# Altium PCB Battery_Operated Node_Ver1.PcbDoc
Units mm, origin at the board's own origin, x right, y up, seen from the top; angles counter-clockwise.
Board outline 41.22 x 57.73 mm, 2 copper layers (Top, Bottom), stack 1.57 mm thick; 58 components, 54 nets, 233 pads, 54 vias.
Unrouted connection lines stored in the file: 1.
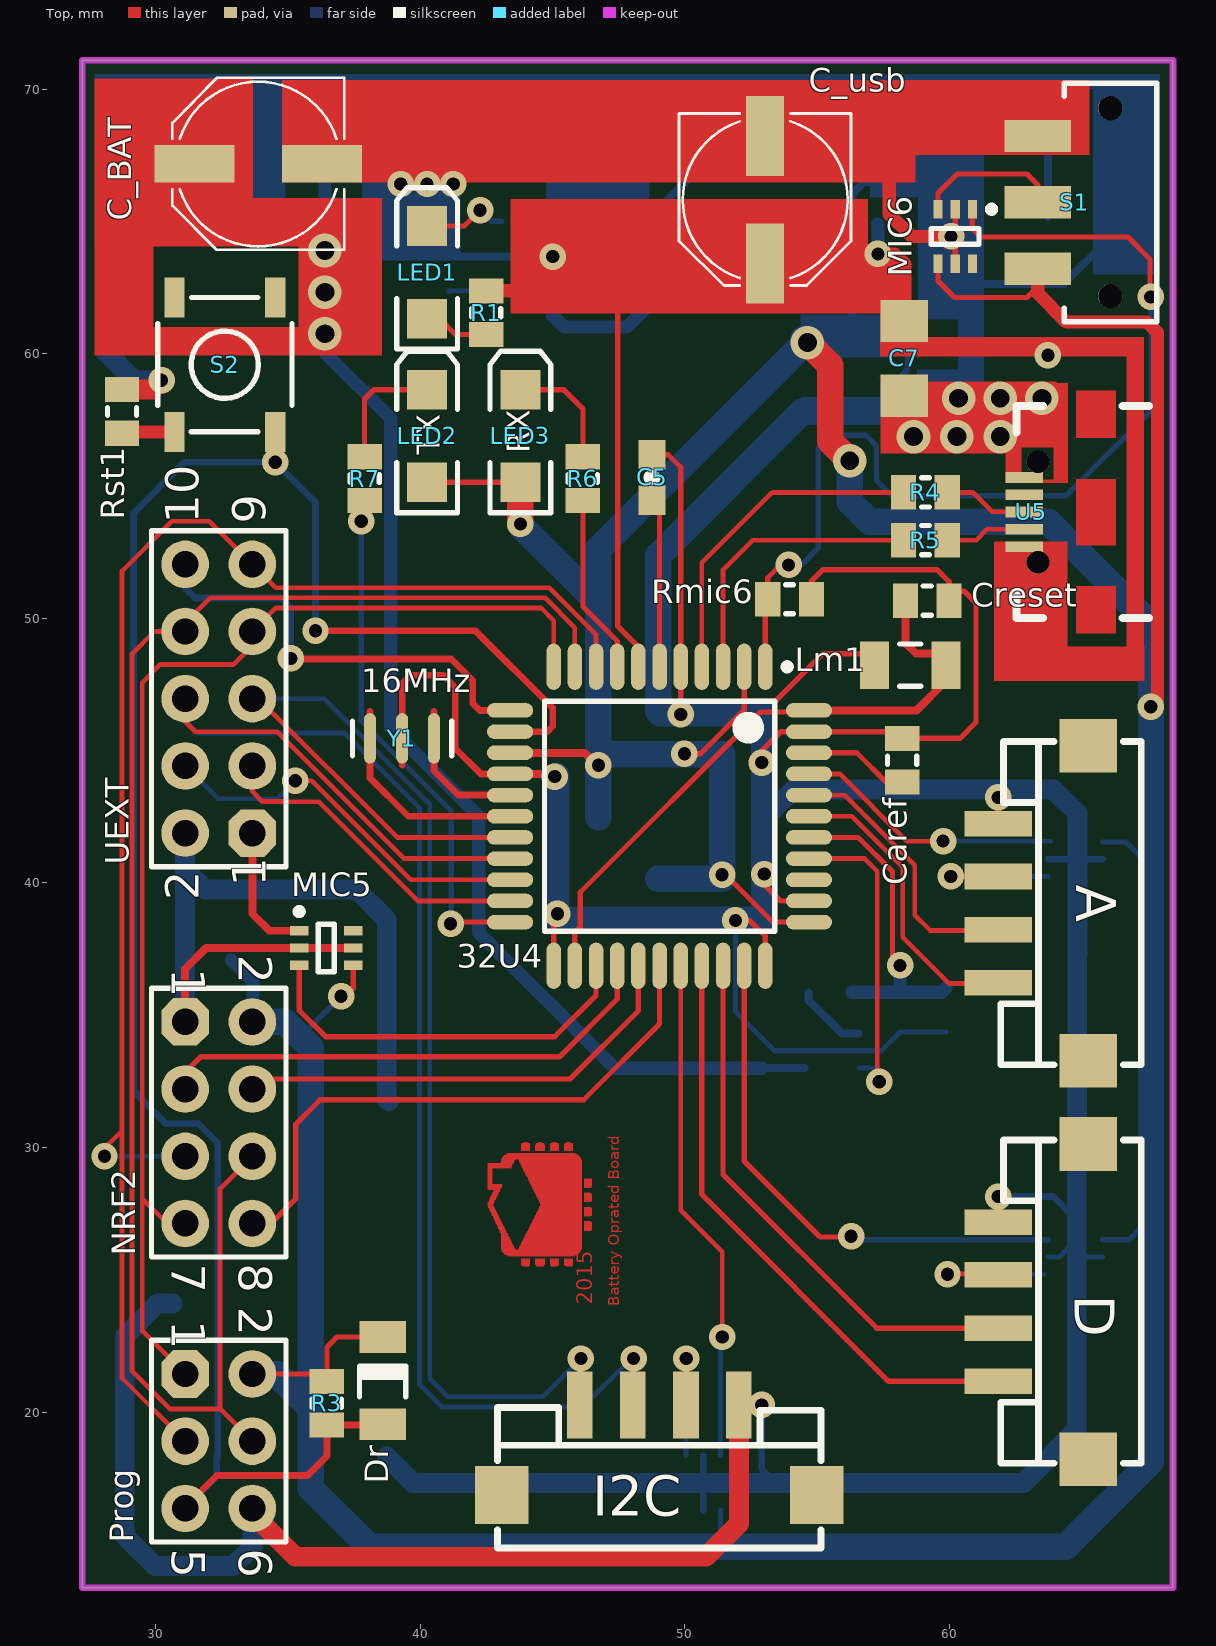
[diagram p0: Top view]
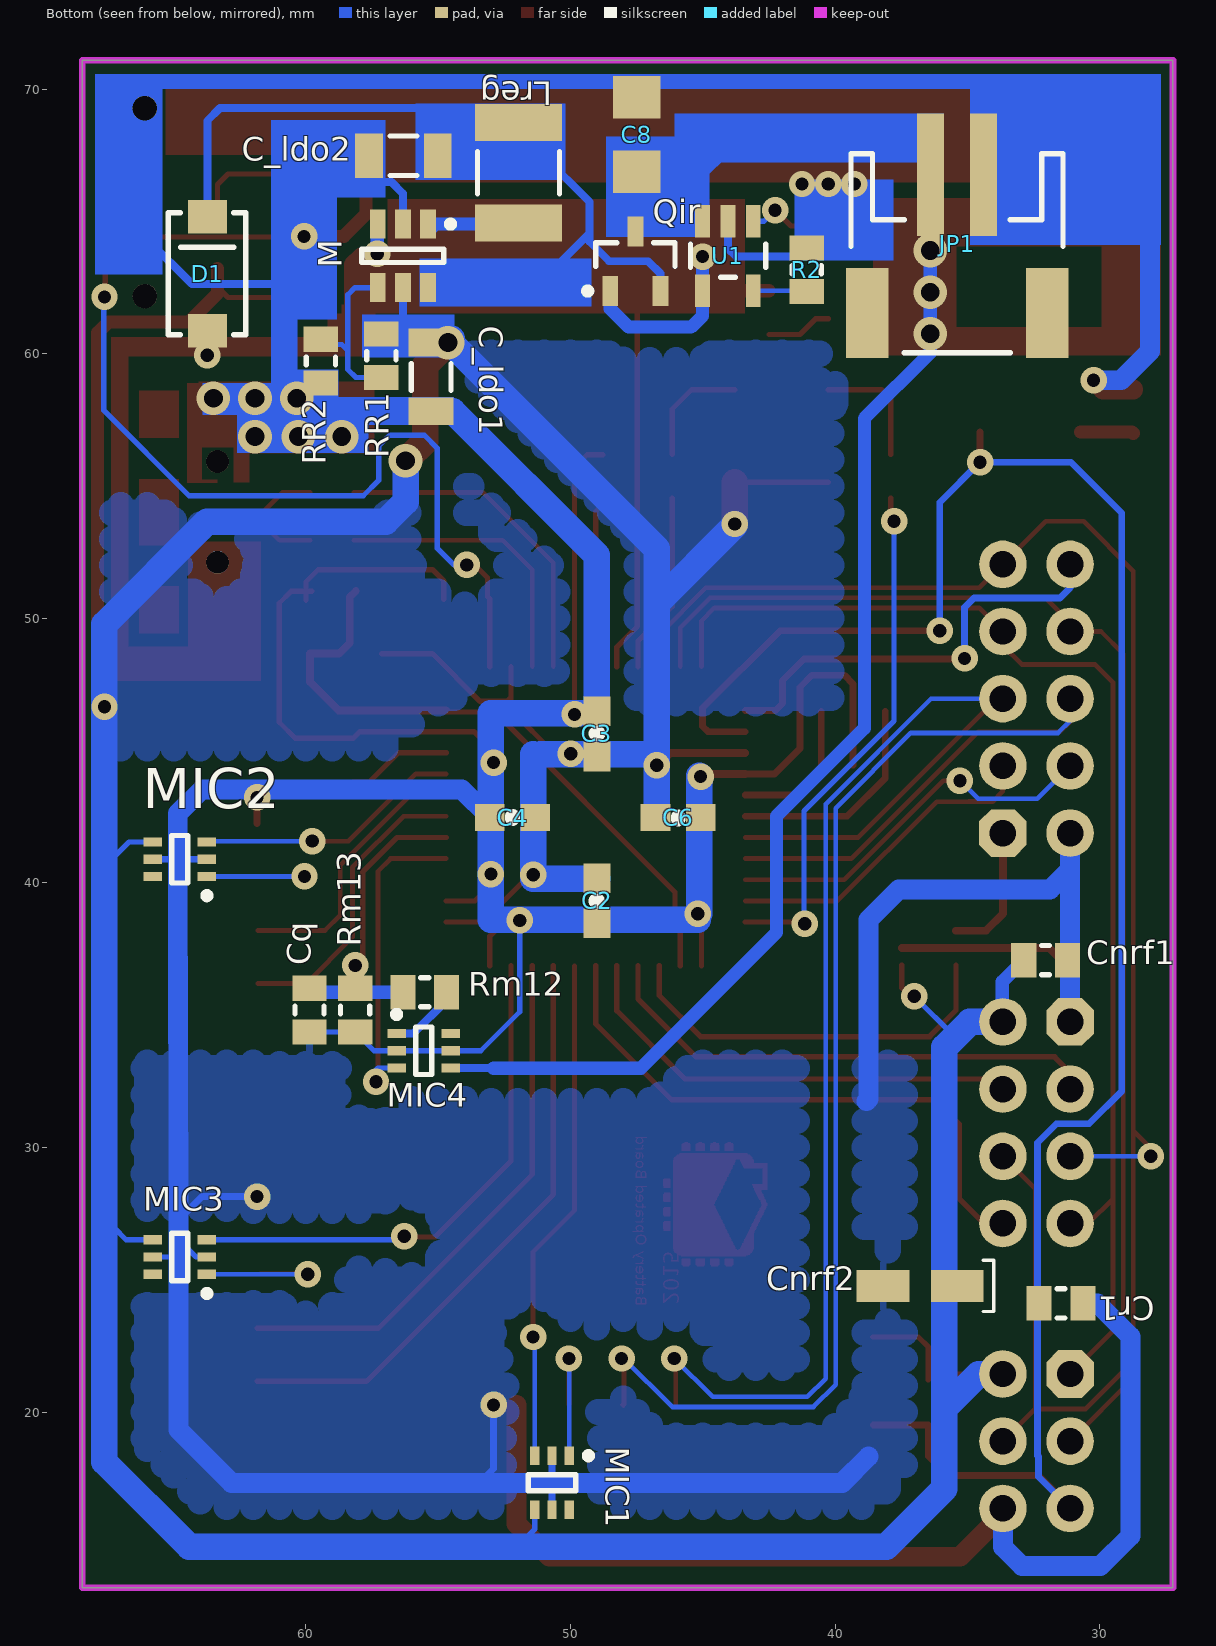
[diagram p1: Bottom view, seen from below]

## Layer stack, top to bottom
Top Solder: solder mask 0.0102, Solder Resist, Dk 3.5
Top: signal copper 0.035
Dielectric 1: core 1.5, FR-4, Dk 4.8
Bottom: signal copper 0.035
Bottom Solder: solder mask 0.0102, Solder Resist, Dk 3.5

## Board outline
27.229,13.36 27.229,71.095 68.453,71.095 68.453,13.36

## Design rules (kind name [scope] priority, off if disabled: settings)
Clearance POLY [InPolygon] p1: gap=0.5
Clearance mdViaVia [IsVia vs IsVia] p2: gap=0.203
Clearance mdPadVia [IsPad vs IsVia] p3: gap=0.203
Clearance mdPadPad [IsPad vs IsPad] p4: gap=0.203
Clearance mdWireVia [(InLayerClass('Signal Layers') AND IsTrack) vs IsVia] p5: gap=0.203
Clearance mdWirePad [(InLayerClass('Signal Layers') AND IsTrack) vs IsPad] p6: gap=0.203
Clearance mdWireWire [(InLayerClass('Signal Layers') AND IsTrack) vs (InLayerClass('Signal Layers') AND IsTrack)] p7: gap=0.203
Clearance [All] p8: gap=0.2
HoleSize [All] p1: absolutevalues=TRUE maxlimit=2540 minlimit=0.381 maxpercent=80.000 minpercent=20.000
HoleToHoleClearance [All] p1: gap=0.203 allowstackedmicrovias=TRUE
PolygonConnect ThermalVias [IsVia] p1: connectstyle=Direct reliefconductorwidth=0.254 reliefentries=4 polygonreliefangle="90 Angle" airgapwidth=0.254
PolygonConnect [All] p2: connectstyle=Relief reliefconductorwidth=0.254 reliefentries=4 polygonreliefangle="90 Angle" airgapwidth=0.254
RoutingVias [All] p1: holewidth=0.5 width=1 viastyle="Through Hole" minholewidth=0.5 minwidth=1 maxholewidth=0.711 maxwidth=1.27
SilkToSilkClearance [All] p1 off: silktosilkclearance=0.254
SilkToSolderMaskClearance [IsPad] p1 off: minsilkscreentomaskgap=0.254 clearancetoexposedcopper=TRUE
SolderMaskExpansion [All] p1: expansion=0.102
Width [All] p1: maxlimit=2540 minlimit=0.178 preferedwidth=0.254
26 further rules are at their usual default settings.

## Components (designator, comment, footprint, x,y, rotation, side; value= is the part's Value field where it differs from the comment)
32U4 "ATmega32U4-AU" 44ML_N 49.047,42.52 r270 top
A "TWIG-4P-2.0-SMD" 4P-SMD-2.0 61.849,39.243 r270 top
C2 ".1uF" 0603-CAP 48.997,39.319 r90 bottom
C3 ".1uF" 0603-CAP 49.004,45.644 r270 bottom
C4 ".1uF" 0603-CAP 52.197,42.469 r180 bottom
C5 "1uF" 0603-CAP 48.768,55.322 r90 top
C6 "4.7uF" 0603-CAP 45.923,42.469 r0 bottom
C7 "4.7uF" 1206 58.293,59.817 r90 top
C8 "4.7uF" 1206 47.498,68.301 r270 bottom
C_BAT "" PANASONIC_D 33.884,67.183 r180 top
C_ldo1 "4.7uF" SMD_CAP_1206 55.27,60.427 r270 bottom
C_ldo2 "4.7uF" SMD_CAP_1206 55.016,67.488 r0 bottom
C_usb "" PANASONIC_D 53.035,65.837 r270 top
Caref "100nF" SMD_CAP_0805 58.217,45.466 r270 top
Cnrf1 "100nF" SMD_CAP_0805 32.868,37.084 r180 bottom
Cnrf2 "4.7uF" "CAPP 1206 (3216X18L) Size A" 35.382,24.765 r0 bottom
Cq "100nF" SMD_CAP_0805 59.868,36.017 r270 bottom
Cr1 "4.7nF" SMD_CAP_0805 32.283,24.105 r180 bottom
Creset "10nF" SMD_CAP_0805 59.995,50.673 r180 top
D "TWIG-4P-2.0-SMD" 4P-SMD-2.0 61.849,24.181 r270 top
D1 "B340A" SMA-DIODE 63.729,63.017 r90 bottom
Dr "1N4148" LL4148 38.583,21.184 r90 top
I2C "TWIG-4P-2.0-SMD" 4P-SMD-2.0 49.047,20.269 r180 top
JP1 "JST-2" JST-2-SMD 35.382,63.068 r0 bottom
LED1 "RED" "LED SMD 1206" 40.259,63.081 r90 top
LED2 "RED" "LED SMD 1206" 40.259,56.896 r90 top
LED3 "RED" "LED SMD 1206" 43.79,56.896 r90 top
Lm1 "Inductor" INDC3216 58.522,48.235 r180 top
Lreg "Inductor" INDC4532 51.968,66.853 r270 bottom
M "mcp1640" MCP1640 56.337,63.703 r270 bottom
MIC1 "MIC94060" mic94060 50.698,17.323 r270 bottom
MIC2 "MIC94060" mic94060 64.77,40.894 r0 bottom
MIC3 "MIC94060" mic94060 64.77,25.857 r0 bottom
MIC4 "MIC94060" mic94060 55.55,33.655 r180 bottom
MIC5 "MIC94060" mic94060 36.449,37.541 r0 top (schematic designator MIC1)
MIC6 "MIC94060" mic94060 60.223,64.44 r270 top (schematic designator MIC1)
NRF2 "Header 4X2" HDR2X4 31.115,34.747 r270 top
Prog "Header 3X2" HDR2X3 31.115,21.438 r270 top
Qir "IRLML6401" Micro3_N 47.549,63.5 r90 bottom
R1 "330" "RES 0805 (2012X06L)" 42.494,62.381 r270 top
R2 "10k" "RES 0805 (2012X06L)" 41.072,62.357 r90 bottom
R3 "4.7k" "RES 0805 (2012X06L)" 36.474,19.507 r90 top
R4 "22" "RES 0805 (2012X06L)" 59.922,54.762 r180 top
R5 "22" "RES 0805 (2012X06L)" 59.922,52.959 r180 top
R6 "330" "RES 0805 (2012X06L)" 46.152,56.112 r270 top
R7 "330" "RES 0805 (2012X06L)" 37.897,56.112 r270 top
Rm12 "1M" "RES 0805 (2012X06L)" 54.686,35.865 r0 bottom
Rm13 "470K" "RES 0805 (2012X06L)" 58.141,36.017 r270 bottom
Rmic6 "330" "RES 0805 (2012X06L)" 53.137,50.721 r0 top
RR1 "976" "RES 0805 (2012X06L)" 57.15,59.106 r90 bottom
RR2 "562" "RES 0805 (2012X06L)" 59.436,58.903 r90 bottom
Rst1 "330" "RES 0805 (2012X06L)" 28.727,58.649 r270 top
S1 "" SWITCH-SPDT-SMD 66.091,65.735 r270 top
S2 "!RESET" TACTILE_SWITCH_SMD 32.614,59.588 r90 top
U1 "MCP73831" SOT23-5 44.044,63.71 r0 bottom
U5 "USB-ABCONN-11794" USB-AB-MICRO-SMD_V03 65.557,54.026 r180 top
UEXT "Header 5X2" HDR2X5 33.655,41.885 r90 top
Y1 "16MHz" RESONATOR-SMD 39.319,45.466 r180 top

## Footprints (in the part's own frame and the unit in brackets; to place one, negate y for a bottom-side part, rotate by r counter-clockwise, add the part's x,y. Pads: shape width x height; smd on the part's side, far side on the other; paste and mask are expansions set on the pad)
4P-SMD-2.0 [mil]
  rect 38x100 smd: 1(-118.11,0) 2(-39.37,0) 3(40,0) 4(119,0)
  rect 80x86 smd: SS1(-234.09,134) SS2(235,134)
  silkscreen extent -240,4 241,213
44ML_N [mm] "Thin QFP, 44-Leads, Body 10x10mm, Pitch 0.8mm, IPC Medium Density"
  oval 1.75x0.55 smd: 1(-5.65,4) 2(-5.65,3.2) 3(-5.65,2.4) 4(-5.65,1.6) 5(-5.65,0.8) 6(-5.65,0) 7(-5.65,-0.8) 8(-5.65,-1.6) 9(-5.65,-2.4) 10(-5.65,-3.2) 11(-5.65,-4) 23(5.65,-4) 24(5.65,-3.2) 25(5.65,-2.4) 26(5.65,-1.6) 27(5.65,-0.8) 28(5.65,0) 29(5.65,0.8) 30(5.65,1.6) 31(5.65,2.4) 32(5.65,3.2) 33(5.65,4)
  oval 0.55x1.75 smd: 12(-4,-5.65) 13(-3.2,-5.65) 14(-2.4,-5.65) 15(-1.6,-5.65) 16(-0.8,-5.65) 17(0,-5.65) 18(0.8,-5.65) 19(1.6,-5.65) 20(2.4,-5.65) 21(3.2,-5.65) 22(4,-5.65) 34(4,5.65) 35(3.2,5.65) 36(2.4,5.65) 37(1.6,5.65) 38(0.8,5.65) 39(0,5.65) 40(-0.8,5.65) 41(-1.6,5.65) 42(-2.4,5.65) 43(-3.2,5.65) 44(-4,5.65)
  silkscreen extent -5.77,-4.35 4.35,4.95, body extent -5,-5 5,5, height 1.2
0603-CAP [mil] "0603-CAP"
  rect 44x40 smd: 1(-33.46,0) 2(34,0)
  silkscreen extent 0,-1 0,2
1206 [mil] "1206"
  rect 63x71 smd: 1(-55.12,0) 2(56,0)
"CAPP 1206 (3216X18L) Size A" [mm] "Chip Capacitor, 2-Leads, Body 3.2x1.6mm, IPC High Density, chip Tantalum"
  rect 1.999x1.199 smd: 1(0,0) 2(2.8,0)
  silkscreen extent -1.38,-0.97 -0.99,0.97, body extent -0.43,-0.9 3.21,0.9, height 1.8
HDR2X3 [mm]
  oct 1.8x1.8 hole 1: 1(0,0)
  round 1.8 hole 1: 2(0,2.54) 3(2.54,0) 4(2.54,2.54) 5(5.08,0) 6(5.08,2.54)
  silkscreen extent -1.27,-1.27 6.35,3.81
HDR2X4 [mm]
  oct 1.8x1.8 hole 1: 1(0,0)
  round 1.8 hole 1: 2(0,2.54) 3(2.54,0) 4(2.54,2.54) 5(5.08,0) 6(5.08,2.54) 7(7.62,0) 8(7.62,2.54)
  silkscreen extent -1.27,-1.27 8.89,3.81
HDR2X5 [mm]
  oct 1.8x1.8 hole 1: 1(0,0)
  round 1.8 hole 1: 2(0,2.54) 3(2.54,0) 4(2.54,2.54) 5(5.08,0) 6(5.08,2.54) 7(7.62,0) 8(7.62,2.54) 9(10.16,0) 10(10.16,2.54)
  silkscreen extent -1.27,-1.27 11.43,3.81
INDC3216 [mm] "Chip Inductor, Body 3.2x1.6mm, IPC High Density"
  rect 1.1x1.8 smd: 1(-1.35,0) 2(1.35,0)
  silkscreen extent -0.4,-0.8 0.4,0.8
INDC4532 [mm] "Chip Inductor, Body 4.5x3.2mm, IPC High Density"
  rect 1.4x3.3 smd: 1(-1.9,0) 2(1.9,0)
  silkscreen extent -0.8,-1.55 0.8,1.55, body extent -2.25,-1.6 2.25,1.6, height 1.75
JST-2-SMD [mil] "JST-2-SMD"
  rect 40x182 smd: 1(-39.37,-145.67) 2(40,-145.67)
  rect 63x134 smd: NC1(-133.86,60) NC2(134,60)
  silkscreen extent -157,-177 158,119
"LED SMD 1206" [mm]
  rect 1.5x1.5 smd: 1(-1.75,0) 2(1.75,0)
  silkscreen extent -2.9,-1.15 3.2,1.15, body extent -1.65,-0.76 1.65,0.69, height 1.36
LL4148 [mm] "MELF Diode, 2-Leads, Body 3.5x1.4mm, IPC Medium Density"
  rect 1.2x1.75 smd: 1(-1.65,0) 2(1.65,0)
  silkscreen extent -0.61,-0.88 0.57,0.88, body extent -1.78,-0.75 1.72,0.75, height 1.55
MCP1640 [mm] "SOT23, 6-Leads, Body 2.90x2.70mm, Pitch 0.95mm, IPC Medium Density"
  rect 1.1x0.6 smd: 1(-1.2,0.95) 2(-1.2,0) 3(-1.2,-0.95) 4(1.2,-0.95) 5(1.2,0) 6(1.2,0.95)
  silkscreen extent -1.32,-1.55 0.25,1.92, body extent -0.9,-1.55 0.9,1.55, height 0.9
mic94060 [mm] "6 pin sc70"
  rect 0.7x0.35 smd: 1(-1.025,0.65) 2(-1.025,0) 3(-1.025,-0.65) 4(1.025,-0.65) 5(1.025,0) 6(1.025,0.65)
  silkscreen extent -1.15,-0.9 0.3,1.5, body extent -0.58,-0.9 0.58,0.9, height 1.1
Micro3_N [mm] "SOT23, 3-Leads, Body 2.9x1.3mm, Pitch 0.95mm, Lead Span 2.3mm, IPC Medium Density"
  rect 1.15x0.6 smd: 1(-1.125,0.95) 2(-1.125,-0.95) 3(1.125,0)
  silkscreen extent -1.25,-1.5 0.7,1.93, body extent -0.7,-1.5 0.7,1.5, height 1.12
PANASONIC_D [mil]
  rect 119x56 smd: +(95,0) -(-94.49,0)
  silkscreen extent -128,-128 128,128
"RES 0805 (2012X06L)" [mm] "Chip Resistor, 2-Leads, Body 2.0x1.3mm, IPC High Density _ (0.100 W)"
  rect 0.95x1.3 smd: 1(0,0) 2(1.65,0)
  silkscreen extent 0.67,-0.55 0.97,0.55, body extent -0.19,-0.63 1.84,0.64, height 0.6
RESONATOR-SMD [mil]
  rrect100% 18x75 smd: 1(-47.24,0) 2(0,0) 3(48,0)
  Top lines w10: 48,40 48,0 48,-40 ; 0,40 0,0 0,-40 ; -47.24,40 -47.24,0 -47.24,-40
  silkscreen extent -74,-25 74,26
SMA-DIODE [mil] "SMA-DIODE"
  rect 50x58 smd: A(-84.65,0) C(85,0)
  silkscreen extent -91,-57 91,58
SMD_CAP_0805 [mm]
  rect 0.95x1.3 smd: 1(0,0) 2(1.65,0)
  silkscreen extent 0.67,-0.55 0.97,0.55, body extent -0.19,-0.63 1.84,0.63, height 0.65
SMD_CAP_1206 [mm]
  rect 1.05x1.7 smd: 1(0,0) 2(2.596,0)
  silkscreen extent 0.8,-0.75 1.8,0.75, body extent -0.22,-0.77 2.82,0.75, height 0.75
SOT23-5 [mil] "SOT23-5"
  rect 22x48 smd: 1(-37.4,-51.18) 2(0,-51.18) 3(38,-51.18) 4(38,52) 5(-37.4,52)
  silkscreen extent -56,-17 56,32
SWITCH-SPDT-SMD [mil]
  round 36 hole 36: 1(-139.76,0) 1(140,0)
  rect 48x99 smd: 1(-98.43,-108.27) 2(0,-108.27) 3(99,-108.27)
  silkscreen extent -177,-69 178,69
TACTILE_SWITCH_SMD [mil] "TACTILE_SWITCH_SMD"
  rect 60x30 smd: 1(-100,75) 2(100,75) 3(-100,-75) 4(100,-75)
  silkscreen extent -100,-100 100,100
USB-AB-MICRO-SMD_V03 [mil] "USB-AB-MICRO-SMD_V03"
  round 34 hole 34: 1(87,75) 1(87,-74.8)
  rect 56x16 smd: D+1(107,0) D-1(107,26) GND1(107,-51.18) ID1(107,-25.59) VBUS1(107,52)
  Top region: -29.53,110 30,110 30,181 -29.53,181
  Top region: -29.49,-49.21 30.04,-49.21 30.04,50 -29.49,50
  Top region: -29.53,-180.47 30,-180.47 30,-109.61 -29.53,-109.61
  silkscreen extent -79,-157 119,158

## Part data
32U4: "8-bit AVR Microcontroller, 2.7-5.5V, 32KB Flash, 2.5KB EEPROM, 1KB SRAM, USB Controller, 44-pin TQFP, Industrial Grade (-40°C to 85°C)"
A D I2C: library part TWIG-4P-2.0-SMD-FEMALE-REINFORCE'DD'
C2 C3 C4 C5 C6: library part CAP0603-CAP, "<b>Capacitor</b> / Standard 0603 ceramic capacitor, and 0.1\" leaded capacitor."
C7 C8: library part CAP1206, "<b>Capacitor</b> / Standard 0603 ceramic capacitor, and 0.1\" leaded capacitor."
C_BAT C_usb: library part CAP_POLD
C_ldo1 C_ldo2 Caref Cnrf1 Cq Cr1 Creset: library part Cap-Bipolar, "Bipolar Capacitor"
Cnrf2: library part Cap-Polar, "Polar Capacitor"
D1: library part DIODE-SCHOTTKY-B340A, "Schottky diodes in SFE's production catalog<p> /  / BAT20J 1A 23V 0.62Vf<br> / RB751 120mA 40V 0.37Vf<br> / PMEG4005EJ 0.5A 40V 0.42Vf<br> / MBRA140 1A 40V 0.5Vf<br> / B340A  3A 40V SMA <br>"
Dr: library part "Diode 1N4148", "High Conductance Fast Diode"
JP1: library part M02-JST-2MM-SMT, "Standard 2-pin 0.1\" header. Use with <br> / - straight break away headers ( PRT-00116)<br> / - right angle break away headers (PRT-00553)<br> / - swiss pins (PRT-00743)<br> / - machine pins (PRT-00117)<br> / - female headers (PRT-00115)<br><br> /  /  Molex polarized connector foot print use with: PRT-08233 with associated crimp pins and housings.<br><br> /  / 2.54_SCREWTERM for use with  PRT-10571.<br><br> /  / 3.5mm Screw Terminal footprints for  PRT-08084<br><br> /  / 5mm Screw Terminal footprints for use with PRT-08433"
LED1 LED2 LED3: library part LED, "LED"
NRF2: "Header, 4-Pin, Dual row"
Prog: "Header, 3-Pin, Dual row"
Qir: "HEXFET Power MOSFET"
R1 R2 R3 R4 R5 R6 R7 Rm12 Rm13 Rmic6 RR1 RR2 Rst1: library part Resistor, "Resistor"
S1: library part SWITCH-SPDTSMD2
S2: library part SWITCH-MOMENTARY-2SMD, "Various NO switches- pushbuttons, reed, etc"
U1: "Miniature single cell, fully integrated Li-Ion, Li-polymer charge management controller<br> / http://ww1.microchip.com/downloads/en/DeviceDoc/21984a.pdf<br> / IC-09995"
U5: "This is a USB AB connector that is compatible with USB OTG. i.e. this connector can serve as a host or device"
UEXT: "Header, 5-Pin, Dual row"
Y1: library part RESONATOR8MHZ

## Via types
v1: diameter 1, hole 0.5, Top to Bottom, 43 vias
v2: diameter 1.27, hole 0.711, Top to Bottom, 11 vias

## Nets (pads, with @x,y where several pads share a name; then routed paths per layer and width w, separated by ;. In a path a pad name is that pad's centre, name@x,y a point inside that pad or via, vN(x,y) a via of type N, cw(c..) or ccw(c..) an arc to the next point about the centre after c; other vN are vias at no path point)
3.3V: 32U4.2 32U4.14 32U4.34 C2.2 C3.2 C4.2 C6.2 C_ldo1.1 Cnrf1.1 Cnrf2.1 Dr.2 LED2.1 LED3.1 Lm1.2 M.5 MIC1.4 MIC2.4 MIC3.4 MIC5.4 MIC6.4 NRF2.2 Prog.2 R3.2 RR1.2 S1.3 | length 242.5
  Top w0.2: Prog.2 36.258,21.438 36.474,21.221 36.474,22.454 36.854,22.834 Dr.2 ; v1(37.008,35.712) 37.16,35.712 37.474,36.026 MIC5.4 ; LED2.1 LED3.1 ; v1(49.987,44.882) 50.597,44.882 52.247,46.532 52.247,47.016 ; v1(51.41,40.31) 51.537,40.31 53.327,38.52 32U4.34 ; 32U4.2 52.247,47.016 ; Lm1.2@57.146,48.666 55.22,48.666 53.416,46.863 52.4,46.863 52.247,47.016 ; MIC6.4 59.573,62.753 60.198,62.128 62.941,62.128 63.341,62.528
  Top w0.3: 32U4.14 46.216,44.92 46.736,44.399 v1(46.736,44.45)
  Top w0.5: S1.3 63.341,62.528 63.341,62.288 64.428,61.201 67.476,61.201 67.876,60.8 67.876,46.921 v1(67.615,46.66)
  Top w1: v1(43.79,53.569) LED3.1 ; v2(54.635,60.427) 55.499,59.563 55.499,56.693 v2@56.134,56.058
  Bottom w0.2: 35.484,34.163 35.484,34.188 v1(37.008,35.712) ; MIC1.4 51.348,15.581 52.019,14.91 ; 65.447,16.298 67.234,18.085 67.234,26.949 ; MIC3.4 66.792,26.507 67.234,26.949 ; MIC2.4 66.685,41.544 67.234,40.996 67.234,26.949
  Bottom w0.3: M.5 56.337,60.935 56.629,60.642 56.922,60.35 RR1.2@57.455,60.35
  Bottom w0.5: Cnrf1.1 33.68,36.271 33.68,34.773 NRF2.2 ; C_ldo1.1 55.347,60.35 RR1.2@56.922,60.35
  Bottom w1: Prog.2 34.569,21.438 35.839,20.168 ; NRF2.2 34.9,34.747 35.484,34.163 35.865,33.782 35.865,17.103 38.058,14.91 52.019,14.91 64.414,14.91 67.626,18.121 67.626,49.773 63.741,53.657 56.985,53.657 56.236,54.407 v2(56.236,55.956) ; v1(43.79,53.569) 43.815,53.543 43.815,53.492 46.736,50.571 ; C6.2@46.736,42.476 v1(46.736,44.45) v1@46.736,44.856 ; C2.2@48.997,40.157 51.41,40.157 v1(51.41,40.31) 51.41,44.856 ; 51.13,44.856 v1@46.736,44.856 ; C_ldo1.1@54.483,60.579 54.483,60.376 46.736,52.629 46.736,50.571 ; v2(54.635,60.427) C_ldo1.1 ; C_ldo1.1@55.27,60.642 RR1.2@56.629,60.642 ; v1@46.736,44.856 46.736,50.571
5V: 32U4.7 C7.2 C_usb.+ D1.A M.3 Qir.1 R1.1 U1.4 U5.VBUS1 | length 54
  Top w0.2: 45.745,63.703 47.473,61.976 47.473,49.69 48.247,48.915 32U4.7
  Top w0.5: R1.1 44.093,62.381 44.171,62.459 ; v1(45.009,63.678) 45.009,63.703 45.745,63.703 v1@57.302,63.703 ; v1(57.302,63.779) 57.937,63.779 58.318,63.398 58.318,60.554 58.725,60.147 66.904,60.147 67.081,59.969 ; 64.186,47.904 66.523,47.904 ; 66.954,59.512 67.005,59.461
  Bottom w0.5: v1(45.009,63.678) U1.4 45.009,61.443 45.441,61.011 47.803,61.011 48.499,61.707 Qir.1 ; M.3 57.302,64.888 v1(57.302,63.779)
  other v1: 63.729,59.944
A0: 32U4.36
A1: 32U4.37 MIC4.3 | length 12
  Top w0.178: 32U4.37 56.803,40.92 57.277,40.445 57.277,32.563 v1(57.353,32.487)
  Bottom w0.178: MIC4.3 57.292,33.005 57.353,32.944 v1(57.353,32.487)
A2: 32U4.38 Cq.1 Rm12.2 Rm13.1 | length 11.8
  Top w0.2: 32U4.38 56.557,41.72 57.85,40.427 57.85,37.171 v1(58.141,36.881)
  Bottom w0.5: Rm12.2 59.715,35.865 Cq.1 ; Rm13.1 v1(58.141,36.881)
A3: 32U4.39 A.4 | length 11.3
  Top w0.178: 32U4.39 56.312,42.52 58.242,40.589 58.242,37.948 59.995,36.195 A.4@61.824,36.195
A4: 32U4.40 A.3 | length 10.4
  Top w0.178: 32U4.40 56.051,43.32 58.699,40.671 58.699,38.786 59.284,38.202 A.3@61.824,38.202
A5: 32U4.41 MIC2.3 | length 10.2
  Top w0.178: 32U4.41 55.855,44.12 58.395,41.58 v1(59.766,41.58)
  Bottom w0.178: v1(59.766,41.58) MIC2.3@63.83,41.58
CE1NRF: 32U4.26 NRF2.3 | length 19.4
  Top w0.2: NRF2.3 31.115,32.842 31.699,33.426 45.263,33.426 47.447,35.611 32U4.26
CSN1NRF: 32U4.27 NRF2.4 | length 17.5
  Top w0.2: NRF2.4 34.036,32.588 45.669,32.588 48.247,35.166 32U4.27
D0: 32U4.20 UEXT.4 | length 14.6
  Top w0.178: v1(35.281,43.866) 35.905,43.866 39.651,40.12 32U4.20
  Bottom w0.178: UEXT.4 32.36,43.18 34.595,43.18 v1(35.281,43.866)
D1: 32U4.21 UEXT.3 | length 12.4
  Top w0.178: UEXT.3 33.655,43.459 34.038,43.077 34.95,43.077 34.953,43.074 36.158,43.074 39.912,39.32 32U4.21
D2: 32U4.19 I2C.3 UEXT.6 | length 59.1
  Top w0.178: UEXT.6 31.115,46.101 31.496,45.72 34.589,45.72 39.39,40.92 32U4.19 ; v1@47.981,22.022 47.981,20.269 48.006,20.244 I2C.3
  Bottom w0.178: UEXT.6 31.115,46.126 31.572,45.669 37.129,45.669 39.975,42.824 39.975,21.036 40.818,20.193 46.152,20.193 v1@47.981,22.022
  other v1: 48.067,22.022
D3: 32U4.18 I2C.4 UEXT.5 | length 50.4
  Top w0.178: UEXT.5 33.884,46.965 39.129,41.72 32U4.18 ; I2C.4 46.025,21.971 v1(46.076,22.022)
  Bottom w0.178: UEXT.5 36.373,46.965 40.356,42.982 40.356,21.265 41.046,20.574 44.628,20.574 v1(46.076,22.022)
D4: 32U4.25 MIC5.3 | length 15.1
  Top w0.2: MIC5.3 35.424,35.188 36.424,34.188 45.085,34.188 46.647,35.751 32U4.25
D5: 32U4.31 D.3 | length 20.7
  Top w0.2: 32U4.31 51.447,28.98 57.263,23.165 D.3
D7: 32U4.1 MIC6.1 Rmic6.1 | length 39.3
  Top w0.2: 32U4.1 53.047,50.734 53.137,50.823 53.137,51.537 53.772,52.172 v1(53.924,52.019) ; MIC6.1 60.873,64.73 61.189,64.414 66.751,64.414 67.589,63.576 67.589,62.103 67.615,62.128 v1(67.615,62.154)
  Bottom w0.2: v1(53.924,52.019) 54.407,52.019 55.042,52.654 55.042,56.439 55.524,56.921 56.845,56.921 57.252,56.515 57.252,55.22 57.836,54.635 64.414,54.635 67.64,57.861 67.64,62.179 v1(67.615,62.154)
D8: 32U4.28 NRF2.8 | length 22.4
  Top w0.2: NRF2.8 34.366,27.127 35.293,28.054 35.293,30.874 36.224,31.804 46.18,31.804 49.047,34.671 32U4.28
D9: 32U4.29 MIC1.3 | length 19.2
  Top w0.178: 32U4.29 49.847,27.623 51.414,26.056 v1(51.414,22.835)
  Bottom w0.178: MIC1.3 51.348,22.769 v1(51.414,22.835)
D10: 32U4.30 D.4 | length 22.8
  Top w0.2: 32U4.30 50.647,28.22 57.709,21.158 D.4
D11: 32U4.12 UEXT.10 | length 16.7
  Top w0.254: v1(35.103,48.489) 35.128,48.463 41.173,48.463 41.986,47.65 41.986,46.787 42.253,46.52 32U4.12
  Bottom w0.254: UEXT.10 31.115,51.156 31.496,50.775 34.747,50.775 35.103,50.419 v1(35.103,48.489)
D13: 32U4.32 MIC3.3 | length 20.1
  Top w0.2: 32U4.32 52.247,29.49 55.118,26.619 56.261,26.619 v1(56.286,26.645)
  Bottom w0.2: v1(56.286,26.645) 56.424,26.507 MIC3.3
D14: 32U4.8 R6.2 | length 6.9
  Top w0.2: R6.2@46.152,54.546 46.152,50.44 47.447,49.145 32U4.8
D15: 32U4.9 NRF2.5 Prog.3 UEXT.9 | length 60.3
  Top w0.178: v1(28.067,29.667) 27.762,29.667 28.727,30.632 ; Prog.3 28.727,21.285 28.727,30.632 ; 32U4.9 46.647,49.39 44.882,51.156 34.544,51.156 UEXT.9 32.029,53.67 30.607,53.67 28.727,51.791 28.727,30.632
  Bottom w0.178: v1(28.067,29.667) NRF2.5
D16: 32U4.10 NRF2.6 Prog.4 UEXT.8 | length 62.6
  Top w0.178: Prog.4 32.436,20.117 ; NRF2.6 32.436,28.448 32.436,20.117 ; 32U4.10 45.847,49.651 44.724,50.775 32.055,50.775 31.115,49.835 UEXT.8 29.947,49.505 29.108,48.666 29.108,21.539 30.531,20.117 32.436,20.117
D17: 32U4.11 NRF2.7 Prog.1 UEXT.7 | length 47.8
  Top w0.178: Prog.1 29.489,23.063 29.489,28.067 ; NRF2.7 30.429,27.127 29.489,28.067 ; 32U4.11 45.047,49.912 44.566,50.394 34.544,50.394 UEXT.7 33.655,48.971 32.944,48.26 30.175,48.26 29.489,47.574 29.489,28.067
D+: 32U4.4 R4.2 | length 12.6
  Top w0.178: 32U4.4 50.647,52.095 53.314,54.762 R4.2@58.192,54.762
D-: 32U4.3 R5.2 | length 10.9
  Top w0.178: 32U4.3 51.447,51.841 52.565,52.959 R5.2@58.192,52.959
GND: 32U4.5 32U4.15 32U4.23 32U4.33 32U4.35 32U4.43 A.1 C2.1 C3.1 C4.1 C5.2 C6.1 C7.1 C8.1 C_BAT.- C_ldo1.2 C_ldo2.2 C_usb.- Caref.1 Cnrf1.2 Cnrf2.2 Cq.2 Cr1.2 Creset.1 D.1 I2C.1 JP1.1 M.2 MIC1.2 MIC1.5 MIC2.2 MIC2.5 MIC3.2 MIC3.5 MIC4.2 MIC4.5 MIC5.2 MIC5.5 MIC6.2 MIC6.5 NRF2.1 Prog.6 R2.2 Rm13.2 Rmic6.2 RR2.1 Rst1.1 S1.1 U1.2 U5.GND1 UEXT.2 Y1.2 | length 313.4
  Top w0.2: 32U4.23 45.047,38.976 v1(45.187,38.837) ; C5.2 49.377,56.186 49.847,55.715 32U4.5 v1(49.847,46.368) ; v1(51.918,38.583) 52.451,38.583 53.047,37.986 32U4.33 ; v1(52.908,44.548) 52.908,44.983 53.644,45.72 32U4.43 57.963,45.72 Caref.1 60.401,45.466 61.011,46.076 61.011,50.571 60.554,51.029 Creset.1@59.995,51.029 ; v1(53.01,40.335) 53.01,39.929 53.619,39.32 32U4.35 ; Rmic6.2 54.787,51.409 55.22,51.841 59.538,51.841 59.995,51.384 Creset.1@59.995,51.029 ; Creset.1@59.769,51.029 Creset.1@59.995,51.029 ; Creset.1 Creset.1@59.995,51.029 ; v1(60.07,64.438) 60.223,64.591 MIC6.2 ; MIC6.5 v1@60.223,64.438
  Top w0.254: 39.319,46.482 39.319,47.523 39.649,47.854 40.869,47.854 41.326,47.396 41.326,45.085 42.291,44.12 32U4.15 ; A.1 v1(61.849,43.231)
  Top w0.3: NRF2.1 31.115,36.754 31.902,37.541 MIC5.2 MIC5.5 ; 32U4.15 v1@44.882,44.12
  Top w0.5: v1(60.07,64.438) 58.575,64.438 57.734,65.278 57.734,67.183 58.786,68.235 S1.1@63.341,68.235
  Top w0.75: Rst1.1 29.87,58.649 v1(30.226,59.004) ; Prog.6 33.655,16.154 35.281,14.529 50.8,14.529 52.047,15.776 I2C.1
  Bottom w0.2: v1(51.918,38.583) 51.918,35.128 53.391,33.655 MIC4.5 MIC4.2 57.428,33.655 Rm13.2 Cq.2 ; v1(60.07,64.438) v1@60.122,64.386 ; MIC3.2 64.16,25.857 64.618,26.314 64.618,26.645 ; 64.821,25.857 MIC3.5
  Bottom w0.254: MIC1.5 50.698,17.094 50.927,17.323 50.698,17.551 MIC1.2 ; v1(52.908,20.269) 52.908,17.856 53.442,17.323 ; v1(61.849,28.143) 63.932,28.143 64.821,27.254 ; MIC2.2 64.516,40.894 64.846,40.564 ; 64.846,40.894 MIC2.5
  Bottom w0.3: JP1.1 34.382,69.592 ; R2.2@40.831,63.678 R2.2@41.161,64.007 ; R2.2 R2.2@41.161,64.007 ; U1.2 44.044,63.983 43.739,63.678 41.49,63.678 R2.2@41.161,64.007 ; C_ldo1.2 58.694,57.831 ; M.2 56.337,66.065 56.769,66.497 57.302,66.497 ; C_ldo2.2 59.512,67.488 60.935,66.065 60.935,62.636 ; RR2.1@59.258,59.106 59.258,58.395 58.694,57.831 ; 60.071,62.636 60.935,62.636 ; 65.989,68.072 65.989,64.313 64.313,62.636 60.935,62.636 ; 58.694,57.831 60.345,57.831 60.935,58.42 60.935,62.636
  Bottom w0.75: 28.092,65.049 28.092,60.096 29.185,59.004 v1(30.226,59.004) ; Cr1.2 30.074,24.105 28.829,22.86 28.829,15.316 29.972,14.173 32.928,14.173 33.655,14.901 Prog.6 ; NRF2.1 UEXT.2 31.115,40.513 31.877,39.751 37.592,39.751 38.735,38.608 38.735,31.826 38.811,31.75 ; 38.735,18.313 39.726,17.323 50.927,17.323 53.442,17.323 62.814,17.323 64.821,19.329 64.821,27.254 64.846,40.564 64.846,40.894 64.846,42.621 63.932,43.536 54.114,43.536 C4.1
  Bottom w1: v1@45.136,38.837 v1@45.136,44.044 ; v1@45.187,38.608 53.01,38.608 v1(53.01,40.335) 53.01,46.406 C3.1@49.073,46.406 ; C3.1 49.004,52.382 54.452,57.831 C_ldo1.2
  other v1: 45.085,44.018 39.268,66.421 40.259,66.421 41.25,66.421
  other v2: 58.649,56.871 60.287,56.871 61.925,56.871 60.35,58.318 61.925,58.318 63.5,58.318
Net32U4_6: 32U4.6 C5.1 | length 6.6
  Top w0.2: C5.1@48.553,54.534 49.047,54.039 32U4.6
Net32U4_16: 32U4.16 Y1.1 | length 4.5
  Top w0.254: Y1.1 40.519,44.45 40.519,44.241 41.44,43.32 32U4.16
Net32U4_17: 32U4.17 Y1.3 | length 7.4
  Top w0.254: Y1.3 38.1,44.45 38.1,43.967 39.548,42.52 32U4.17
Net32U4_24: 32U4.24 32U4.44 Creset.2 Lm1.1 | length 24.8
  Top w0.2: 32U4.24 45.847,38.126 46.05,38.329 46.05,39.649 52.861,46.46 54.697,46.46 32U4.44
  Top w0.3: 32U4.44 58.762,46.52 59.846,47.603 59.846,48.666 58.75,48.666 58.344,49.073 58.344,50.804 Creset.2@58.119,51.029
Net32U4_42: 32U4.42 Caref.2 | length 4
  Top w0.2: 32U4.42 56.503,44.92 57.606,43.816 Caref.2
NetA_2: A.2 MIC2.1 | length 5.5
  Top w0.178: v1(60.056,40.244) v1(60.056,40.244) A.2
  Bottom w0.178: v1(60.056,40.244) MIC2.1
NetC_ldo2_1: C_ldo2.1 D1.C Lreg.1 M.6 Qir.2 | length 29.5
  Bottom w0.3: Qir.2 46.599,63.033 47.066,63.5 48.539,63.5 49.276,64.237 49.276,64.567 ; 50.444,63.398 49.276,64.567 ; Lreg.1 51.968,68.25 52.54,67.678 ; M.6 55.387,63.104 ; D1.C 63.729,68.809 63.246,69.291 55.372,69.291 55.016,68.936 C_ldo2.1 51.029,67.488 49.276,65.735 49.276,64.567
NetD_2: D.2 MIC3.1 | length 5.5
  Top w0.178: v1(59.934,25.207) 59.958,25.232 D.2@61.722,25.232
  Bottom w0.178: v1(59.934,25.207) MIC3.1@63.593,25.207
NetI2C_2: I2C.2 MIC1.1 | length 5.6
  Top w0.178: I2C.2@50.059,20.281 v1@50.059,22.098
  Bottom w0.178: MIC1.1 50.048,22.108 v1@50.059,22.098
  other v1: 50.059,22.022
NetLED1_1: LED1.1 R1.2 | length 2.5
  Top w0.2: LED1.1 40.726,61.331 41.326,60.731 R1.2
NetLED1_2: LED1.2 U1.1 | length 3.6
  Top w0.2: LED1.2 41.667,64.831 v1(42.266,65.43) v1@42.647,65.43
  Bottom w0.2: v1(42.266,65.43) 42.686,65.01 U1.1
NetLED2_2: LED2.2 R7.1 | length 4.6
  Top w0.2: R7.1@37.897,56.196 37.897,58.293 38.25,58.646 LED2.2
NetLED3_2: LED3.2 R6.1 | length 4.4
  Top w0.2: LED3.2 45.418,58.646 46.152,57.912 R6.1@46.152,56.196
NetLreg_2: Lreg.2 M.1 | length 3.6
  Bottom w0.5: Lreg.2 52.018,64.903 M.1 M.1@55.249,64.765
NetM_4: M.4 RR1.1 RR2.2 | length 6.1
  Bottom w0.2: M.4 58.147,62.503 58.42,62.23 58.42,59.411 58.115,59.106 RR1.1@57.455,59.106 ; 58.42,60.122 58.648,60.35 RR2.2@59.258,60.35
NetMIC4_1: MIC4.1 Rm12.1 | length 2.7
  Bottom w0.3: Rm12.1 54.686,35.56 55.941,34.305 MIC4.1
NetMIC6_3: MIC6.3 S1.2 | length 5.5
  Top w0.2: MIC6.3 59.573,66.076 60.3,66.802 62.941,66.802 63.341,66.402 S1.2
NetR2_1: R2.1 U1.5 | length 2
  Bottom w0.178: R2.1 41.104,62.389 U1.5
NetR4_1: R4.1 U5.D+1 | length 3.3
  Top w0.178: R4.1@59.842,54.762 60.884,54.762 61.62,54.026 U5.D+1
NetR5_1: R5.1 U5.D-1 | length 3.2
  Top w0.178: R5.1@59.842,52.959 61.011,52.959 61.417,53.365 U5.D-1
NetRst1_2: Rst1.2 S2.1 | length 2
  Top w0.5: Rst1.2 28.777,57.048 S2.1
RESET: 32U4.13 Cr1.1 Dr.1 Prog.5 R3.1 S2.3 | length 76.5
  Top w0.254: Prog.5 31.115,16.408 32.309,17.602 35.738,17.602 36.474,18.339 R3.1 Dr.1@38.556,19.507 ; v1(34.519,55.905) S2.3 ; v1(36.043,49.53) 42.088,49.53 45.009,46.609 45.009,45.923 44.805,45.72 32U4.13
  Bottom w0.254: Prog.5 32.309,17.551 32.309,18.315 32.345,18.352 32.345,30.177 31.625,30.897 30.393,30.897 29.159,32.131 29.159,53.975 31.09,55.905 v1(34.519,55.905) 36.043,54.381 v1(36.043,49.53)
TX_LED: 32U4.22 R7.2 | length 20.1
  Top w0.2: v1(37.77,53.67) 37.897,53.543 R7.2@37.897,54.546 ; v1(41.148,38.456) 41.212,38.52 32U4.22
  Bottom w0.2: v1(37.77,53.67) 37.77,46.126 41.173,42.723 41.173,38.481 v1(41.148,38.456)
UEXT_POWER: MIC5.1 UEXT.1 | length 5.1
  Top w0.3: UEXT.1 33.655,38.837 34.3,38.191 MIC5.1
V_BATT: C8.2 C_BAT.+ JP1.2 MIC4.4 Qir.3 U1.3 | length 52.1
  Bottom w0.3: 44.145,67.92 44.145,67.615 45.009,66.751 U1.3 46.267,65.01 46.652,64.625 Qir.3 ; 52.284,33.005 MIC4.4
  Bottom w0.5: JP1.2 36.398,60.046 38.887,57.556 38.887,45.847 42.215,42.52 42.215,38.125 47.346,32.995 52.908,32.995
  other v2: 36.398,60.757 36.398,62.332 36.398,63.906
pads on no net: A.SS1 A.SS2 D.SS1 D.SS2 I2C.SS1 I2C.SS2 JP1.NC1 JP1.NC2 MIC1.6 MIC2.6 MIC3.6 MIC4.6 MIC5.6 MIC6.6 S2.2 S2.4 U5.1 U5.ID1
copper on no net: | length 402.6
  Top w0.025: 42.57,27.8 42.57,27.902 ; 42.57,28.41 42.57,29.4 ; 42.596,27.724 42.596,27.953 ; 42.596,28.41 42.596,29.4 ; 42.621,27.673 42.621,28.029 ; 42.621,28.41 42.621,29.4 ; 42.647,27.622 42.647,28.054 ; 42.647,28.41 42.647,29.4 ; 42.672,27.572 42.672,28.13 ; 42.672,28.41 42.672,29.4 ; 42.697,27.521 42.697,28.156 ; 42.697,28.41 42.697,29.4 ; 42.723,27.445 42.723,28.232 ; 42.723,28.41 42.723,29.4 ; 42.748,27.419 42.748,28.283 ; 42.748,28.41 42.748,28.613 ; 42.748,29.223 42.748,29.4 ; 42.774,27.368 42.774,27.8 ; 42.774,27.877 42.774,28.334 ; 42.774,28.41 42.774,28.613 ; 42.774,29.223 42.774,29.4 ; 42.799,27.318 42.799,27.749 ; 42.799,27.927 42.799,28.384 ; 42.799,28.41 42.799,28.613 ; 42.799,29.223 42.799,29.4 ; 42.824,27.241 42.824,27.699 ; 42.824,28.003 42.824,28.613 ; 42.824,29.223 42.824,29.4 ; 42.85,27.191 42.85,27.648 ; 42.85,28.029 42.85,28.613 ; 42.85,29.223 42.85,29.4 ; 42.875,27.14 42.875,27.597 ; 42.875,28.08 42.875,28.613 ; 42.875,29.223 42.875,29.4 ; 42.901,27.089 42.901,27.546 ; 42.901,28.13 42.901,28.613 ; 42.901,29.223 42.901,29.4 ; 42.926,27.038 42.926,27.495 ; 42.926,28.181 42.926,28.613 ; 42.926,29.223 42.926,29.4 ; 42.951,26.987 42.951,27.445 ; 42.951,28.232 42.951,28.613 ; 42.951,29.223 42.951,29.4 ; 42.977,26.937 42.977,27.394 ; 42.977,28.283 42.977,28.613 ; 42.977,29.223 42.977,29.4 ; 43.002,26.886 43.002,27.343 ; 43.002,28.334 43.002,28.613 ; 43.002,29.223 43.002,29.4 ; 43.028,26.835 43.028,27.292 ; 43.028,28.384 43.028,28.613 ; 43.028,29.223 43.028,29.4 ; 43.053,26.784 43.053,27.216 ; 43.053,28.461 43.053,28.613 ; 43.053,29.223 43.053,29.4 ; 43.078,26.149 43.078,27.191 ; 43.078,28.486 43.078,28.613 ; 43.078,29.223 43.078,29.527 ; 43.104,26.098 43.104,27.14 ; 43.104,28.562 43.104,28.613 ; 43.104,29.223 43.104,29.578 ; 43.129,26.048 43.129,27.089 ; 43.129,29.223 43.129,29.629 ; 43.155,26.022 43.155,27.013 ; 43.155,29.223 43.155,29.654 ; 43.18,25.997 43.18,26.987 ; 43.18,29.223 43.18,29.68 ; 43.205,25.971 43.205,26.937 ; 43.205,29.223 43.205,29.705 ; 43.231,25.946 43.231,26.886 ; 43.231,29.223 43.231,29.731 ; 43.256,25.946 43.256,26.81 ; 43.256,29.223 43.256,29.731 ; 43.282,25.921 43.282,26.759 ; 43.282,29.223 43.282,29.756 ; 43.307,25.921 43.307,26.733 ; 43.307,29.223 43.307,29.756 ; 43.332,25.921 43.332,26.657 ; 43.332,29.223 43.332,29.781 ; 43.358,25.895 43.358,26.632 ; 43.358,29.223 43.358,29.781 ; 43.383,25.895 43.383,26.581 ; 43.383,29.223 43.383,29.781 ; 43.409,25.895 43.409,26.53 ; 43.409,29.223 43.409,29.781 ; 43.434,25.895 43.434,26.479 ; 43.434,29.223 43.434,29.781 ; 43.459,25.895 43.459,26.403 ; 43.459,29.273 43.459,29.781 ; 43.485,25.895 43.485,26.378 ; 43.485,29.324 43.485,29.781 ; 43.51,25.895 43.51,26.302 ; 43.51,29.375 43.51,29.781 ; 43.536,25.895 43.536,26.276 ; 43.536,29.426 43.536,29.781 ; 43.561,25.895 43.561,26.2 ; 43.561,29.477 43.561,29.781 ; 43.586,25.895 43.586,26.175 ; 43.586,29.527 43.586,29.781 ; 43.612,25.895 43.612,26.149 ; 43.612,29.553 43.612,29.781 ; 43.637,25.895 43.637,26.124 ; 43.637,29.553 43.637,29.781 ; 43.663,25.895 43.663,26.124 ; 43.663,29.553 43.663,29.781 ; 43.688,25.895 43.688,26.124 ; 43.688,29.553 43.688,29.781 ; 43.713,25.895 43.713,26.149 ; 43.713,29.553 43.713,29.781 ; 43.739,25.895 43.739,26.175 ; 43.739,29.527 43.739,29.781 ; 43.764,25.895 43.764,26.226 ; 43.764,29.451 43.764,29.781 ; 43.79,25.895 43.79,26.276 ; 43.79,29.426 43.79,29.781 ; 43.815,25.895 43.815,26.327 ; 43.815,29.35 43.815,29.781 ; 43.84,25.54 43.84,25.794 ; 43.84,25.895 43.84,26.378 ; 43.84,29.324 43.84,29.781 ; 43.84,29.883 43.84,30.137 ; 43.866,25.54 43.866,25.794 ; 43.866,25.895 43.866,26.429 ; 43.866,29.248 43.866,29.781 ; 43.866,29.883 43.866,30.162 ; 43.891,25.514 43.891,25.794 ; 43.891,25.895 43.891,26.479 ; 43.891,29.197 43.891,29.781 ; 43.891,29.883 43.891,30.162 ; 43.917,25.514 43.917,25.794 ; 43.917,25.895 43.917,26.53 ; 43.917,29.146 43.917,29.781 ; 43.917,29.883 43.917,30.162 ; 43.942,25.514 43.942,25.794 ; 43.942,25.895 43.942,26.581 ; 43.942,29.096 43.942,29.781 ; 43.942,29.883 43.942,30.188 ; 43.967,25.514 43.967,25.794 ; 43.967,25.895 43.967,26.632 ; 43.967,29.045 43.967,29.781 ; 43.967,29.883 43.967,30.188 ; 43.993,25.514 43.993,25.794 ; 43.993,25.895 43.993,26.683 ; 43.993,28.994 43.993,29.781 ; 43.993,29.883 43.993,30.188 ; 44.018,25.514 44.018,25.794 ; 44.018,25.895 44.018,26.733 ; 44.018,28.943 44.018,29.781 ; 44.018,29.883 44.018,30.188 ; 44.044,25.514 44.044,25.794 ; 44.044,25.895 44.044,26.784 ; 44.044,28.892 44.044,29.781 ; 44.044,29.883 44.044,30.188 ; 44.069,25.514 44.069,25.794 ; 44.069,25.895 44.069,26.835 ; 44.069,28.867 44.069,29.781 ; 44.069,29.883 44.069,30.162 ; 44.094,25.514 44.094,25.794 ; 44.094,25.895 44.094,26.886 ; 44.094,28.791 44.094,29.781 ; 44.094,29.883 44.094,30.162 ; 44.12,25.514 44.12,25.794 ; 44.12,25.895 44.12,26.937 ; 44.12,28.74 44.12,29.781 ; 44.12,29.883 44.12,30.162 ; 44.145,25.54 44.145,25.794 ; 44.145,25.895 44.145,26.987 ; 44.145,28.689 44.145,29.781 ; 44.145,29.883 44.145,30.137 ; 44.171,25.895 44.171,27.038 ; 44.171,28.639 44.171,29.781 ; 44.196,25.895 44.196,27.089 ; 44.196,28.588 44.196,29.781 ; 44.221,25.895 44.221,27.14 ; 44.221,28.537 44.221,29.781 ; 44.247,25.895 44.247,27.191 ; 44.247,28.486 44.247,29.781 ; 44.272,25.895 44.272,27.241 ; 44.272,28.435 44.272,29.781 ; 44.298,25.895 44.298,27.292 ; 44.298,28.384 44.298,29.781 ; 44.323,25.895 44.323,27.343 ; 44.323,28.334 44.323,29.781 ; 44.348,25.895 44.348,27.394 ; 44.348,28.283 44.348,29.781 ; 44.374,25.565 44.374,25.794 ; 44.374,25.895 44.374,27.445 ; 44.374,28.232 44.374,29.781 ; 44.374,29.883 44.374,30.112 ; 44.399,25.54 44.399,25.794 ; 44.399,25.895 44.399,27.495 ; 44.399,28.181 44.399,29.781 ; 44.399,29.883 44.399,30.162 ; 44.425,25.514 44.425,25.794 ; 44.425,25.895 44.425,27.546 ; 44.425,28.13 44.425,29.781 ; 44.425,29.883 44.425,30.162 ; 44.45,25.514 44.45,25.794 ; 44.45,25.895 44.45,27.597 ; 44.45,28.08 44.45,29.781 ; 44.45,29.883 44.45,30.162 ; 44.475,25.514 44.475,25.794 ; 44.475,25.895 44.475,27.648 ; 44.475,28.029 44.475,29.781 ; 44.475,29.883 44.475,30.162 ; 44.501,25.514 44.501,25.794 ; 44.501,25.895 44.501,27.699 ; 44.501,27.978 44.501,29.781 ; 44.501,29.883 44.501,30.188 ; 44.526,25.514 44.526,25.794 ; 44.526,25.895 44.526,27.775 ; 44.526,27.927 44.526,29.781 ; 44.526,29.883 44.526,30.188 ; 44.552,25.514 44.552,25.794 ; 44.552,25.895 44.552,27.8 ; 44.552,27.877 44.552,29.781 ; 44.552,29.883 44.552,30.188 ; 44.577,25.514 44.577,25.794 ; 44.577,25.895 44.577,29.781 ; 44.577,29.883 44.577,30.188 ; 44.602,25.514 44.602,25.794 ; 44.602,25.895 44.602,29.781 ; 44.602,29.883 44.602,30.162 ; 44.628,25.514 44.628,25.794 ; 44.628,25.895 44.628,29.781 ; 44.628,29.883 44.628,30.162 ; 44.653,25.514 44.653,25.794 ; 44.653,25.895 44.653,29.781 ; 44.653,29.883 44.653,30.162 ; 44.679,25.54 44.679,25.794 ; 44.679,25.895 44.679,29.781 ; 44.679,29.883 44.679,30.162 ; 44.704,25.565 44.704,25.794 ; 44.704,25.895 44.704,29.781 ; 44.704,29.883 44.704,30.112 ; 44.729,25.895 44.729,29.781 ; 44.755,25.895 44.755,29.781 ; 44.78,25.895 44.78,29.781 ; 44.806,25.895 44.806,29.781 ; 44.831,25.895 44.831,29.781 ; 44.856,25.895 44.856,29.781 ; 44.882,25.895 44.882,29.781 ; 44.907,25.895 44.907,29.781 ; 44.933,25.54 44.933,25.794 ; 44.933,25.895 44.933,29.781 ; 44.933,29.883 44.933,30.137 ; 44.958,25.514 44.958,25.794 ; 44.958,25.895 44.958,29.781 ; 44.958,29.883 44.958,30.162 ; 44.983,25.514 44.983,25.794 ; 44.983,25.895 44.983,29.781 ; 44.983,29.883 44.983,30.162 ; 45.009,25.514 45.009,25.794 ; 45.009,25.895 45.009,29.781 ; 45.009,29.883 45.009,30.162 ; 45.034,25.514 45.034,25.794 ; 45.034,25.895 45.034,29.781 ; 45.034,29.883 45.034,30.188 ; 45.06,25.514 45.06,25.794 ; 45.06,25.895 45.06,29.781 ; 45.06,29.883 45.06,30.188 ; 45.085,25.514 45.085,25.794 ; 45.085,25.895 45.085,29.781 ; 45.085,29.883 45.085,30.188 ; 45.11,25.514 45.11,25.794 ; 45.11,25.895 45.11,29.781 ; 45.11,29.883 45.11,30.188 ; 45.136,25.514 45.136,25.794 ; 45.136,25.895 45.136,29.781 ; 45.136,29.883 45.136,30.188 ; 45.161,25.514 45.161,25.794 ; 45.161,25.895 45.161,29.781 ; 45.161,29.883 45.161,30.162 ; 45.187,25.514 45.187,25.794 ; 45.187,25.895 45.187,29.781 ; 45.187,29.883 45.187,30.162 ; 45.212,25.54 45.212,25.794 ; 45.212,25.895 45.212,29.781 ; 45.212,29.883 45.212,30.162 ; 45.237,25.54 45.237,25.794 ; 45.237,25.895 45.237,29.781 ; 45.237,29.883 45.237,30.137 ; 45.263,25.895 45.263,29.781 ; 45.288,25.895 45.288,29.781 ; 45.314,25.895 45.314,29.781 ; 45.339,25.895 45.339,29.781 ; 45.364,25.895 45.364,29.781 ; 45.39,25.895 45.39,29.781 ; 45.415,25.895 45.415,29.781 ; 45.441,25.895 45.441,29.781 ; 45.466,25.54 45.466,25.794 ; 45.466,25.895 45.466,29.781 ; 45.466,29.883 45.466,30.137 ; 45.491,25.54 45.491,25.794 ; 45.491,25.895 45.491,29.781 ; 45.491,29.883 45.491,30.162 ; 45.517,25.514 45.517,25.794 ; 45.517,25.895 45.517,29.781 ; 45.517,29.883 45.517,30.162 ; 45.542,25.514 45.542,25.794 ; 45.542,25.895 45.542,29.781 ; 45.542,29.883 45.542,30.162 ; 45.568,25.514 45.568,25.794 ; 45.568,25.895 45.568,29.781 ; 45.568,29.883 45.568,30.188 ; 45.593,25.514 45.593,25.794 ; 45.593,25.895 45.593,29.781 ; 45.593,29.883 45.593,30.188 ; 45.618,25.514 45.618,25.794 ; 45.618,25.895 45.618,29.781 ; 45.618,29.883 45.618,30.188 ; 45.644,25.514 45.644,25.794 ; 45.644,25.895 45.644,29.781 ; 45.644,29.883 45.644,30.188 ; 45.669,25.514 45.669,25.794 ; 45.669,25.895 45.669,29.781 ; 45.669,29.883 45.669,30.188 ; 45.695,25.514 45.695,25.794 ; 45.695,25.895 45.695,29.781 ; 45.695,29.883 45.695,30.162 ; 45.72,25.514 45.72,25.794 ; 45.72,25.895 45.72,29.781 ; 45.72,29.883 45.72,30.162 ; 45.745,25.514 45.745,25.794 ; 45.745,25.895 45.745,29.781 ; 45.745,29.883 45.745,30.162 ; 45.771,25.54 45.771,25.794 ; 45.771,25.895 45.771,29.781 ; 45.771,29.883 45.771,30.137 ; 45.796,25.895 45.796,29.781 ; 45.822,25.895 45.822,29.781 ; 45.847,25.921 45.847,29.781 ; 45.872,25.921 45.872,29.756 ; 45.898,25.921 45.898,29.756 ; 45.923,25.946 45.923,29.731 ; 45.949,25.946 45.949,29.731 ; 45.974,25.971 45.974,29.705 ; 45.999,25.997 45.999,29.68 ; 46.025,26.022 46.025,29.654 ; 46.05,26.048 46.05,29.629 ; 46.076,26.098 46.076,29.604 ; 46.101,26.149 46.101,29.527 ; 46.228,26.86 46.228,27.216 ; 46.228,27.394 46.228,27.749 ; 46.228,27.953 46.228,28.283 ; 46.228,28.486 46.228,28.816 ; 46.253,26.86 46.253,27.216 ; 46.253,27.394 46.253,27.749 ; 46.253,27.953 46.253,28.283 ; 46.253,28.486 46.253,28.816 ; 46.279,26.86 46.279,27.216 ; 46.279,27.394 46.279,27.749 ; 46.279,27.953 46.279,28.283 ; 46.279,28.486 46.279,28.816 ; 46.304,26.86 46.304,27.216 ; 46.304,27.394 46.304,27.749 ; 46.304,27.953 46.304,28.283 ; 46.304,28.486 46.304,28.816 ; 46.33,26.86 46.33,27.216 ; 46.33,27.394 46.33,27.749 ; 46.33,27.953 46.33,28.283 ; 46.33,28.486 46.33,28.816 ; 46.355,26.86 46.355,27.216 ; 46.355,27.394 46.355,27.749 ; 46.355,27.953 46.355,28.283 ; 46.355,28.486 46.355,28.816 ; 46.38,26.86 46.38,27.216 ; 46.38,27.394 46.38,27.749 ; 46.38,27.953 46.38,28.283 ; 46.38,28.486 46.38,28.816 ; 46.406,26.86 46.406,27.216 ; 46.406,27.394 46.406,27.749 ; 46.406,27.953 46.406,28.283 ; 46.406,28.486 46.406,28.816 ; 46.431,26.86 46.431,27.216 ; 46.431,27.394 46.431,27.749 ; 46.431,27.953 46.431,28.283 ; 46.431,28.486 46.431,28.816 ; 46.457,26.86 46.457,27.191 ; 46.457,27.419 46.457,27.724 ; 46.457,27.953 46.457,28.258 ; 46.457,28.486 46.457,28.816 ; 46.482,26.911 46.482,27.165 ; 46.482,27.445 46.482,27.699 ; 46.482,27.978 46.482,28.232 ; 46.482,28.537 46.482,28.791

## Polygon pours and split planes (outlines as drawn)
3.3V on Bottom "3.3V" (hatched 90Degree grid 1 track 1, remove dead copper, pour order 2): 56.007,54.28 56.007,49.53 56.007,45.085 61.9,45.085 68.072,45.085 68.072,44.806 68.072,54.28 64.973,54.28 61.9,54.28
GND on Bottom "GND" (hatched 90Degree grid 1 track 1, remove dead copper, pour order 10): 33.655,33.21 50.508,33.21 67.767,33.21 68.047,13.64 67.945,13.538 67.767,13.716 33.655,16.358
3.3V on Bottom "3.3V" (hatched 90Degree grid 1 track 1, remove dead copper, pour order 12): 36.398,60.046 57.785,60.046 57.81,60.071 57.81,46.787 36.398,46.787

## Keep-outs
Keep-Out Layer:
  the board outline again, w0.254

## Other copper
Top:
  rectangle net 5V: 66.421,60.35 66.878,60.63
  rectangle net 5V: 66.7,59.614 67.361,60.63
  rectangle net 5V: 57.379,59.893 58.649,61.874
  rectangle net V_BATT: 29.921,59.944 35.738,61.011
  rectangle net V_BATT: 27.686,59.944 29.921,64.059
  rectangle net V_BATT: 35.408,59.944 38.557,64.059
  rectangle net V_BATT: 33.376,64.059 38.557,65.888
  rectangle net V_BATT: 27.686,64.059 33.68,70.409
  rectangle net 5V: 61.697,48.438 64.465,52.908
  rectangle net 5V: 58.649,59.893 59.182,61.519
  rectangle net 5V: 66.7,48.158 67.361,59.995
  rectangle net 5V: 59.03,59.893 66.675,60.63
  rectangle net 5V: 43.409,63.703 56.921,65.862
  rectangle net GND: 58.725,67.513 65.303,70.358
  rectangle net GND: 34.773,66.472 58.725,70.358
  rectangle net 5V: 43.409,61.519 58.09,63.881
  rectangle net GND: 63.348,55.118 64.491,55.245
  rectangle net GND: 62.738,56.464 64.059,58.953
  rectangle: 63.932,55.245 64.491,58.903
  rectangle net GND: 62.128,55.143 62.738,56.794
  rectangle net GND: 57.404,56.236 62.738,58.953
  rectangle net 5V: 61.697,47.625 67.386,48.946
  text "2015" at 46.711,24.054 h1 r90
  text "Battery Oprated Board" at 47.676,24.003 h0.7 r90
Bottom:
  rectangle net V_BATT: 44.755,64.414 48.666,68.224
  rectangle net V_BATT: 44.907,66.091 46.609,68.021
  rectangle net GND: 61.316,57.683 63.906,58.903
  rectangle net GND: 57.633,56.261 62.611,57.81
  rectangle net V_BATT: 35.89,67.589 46.076,69.088
  rectangle net 3.3V: 54.381,59.868 57.887,61.493
  rectangle net V_BATT: 35.89,67.234 48.387,68.123
  rectangle net GND: 37.795,63.525 41.529,66.599
  rectangle net NetC_ldo2_1: 50.19,66.573 55.855,69.469
  rectangle net GND: 56.998,65.913 61.087,68.834
  rectangle net GND: 58.826,61.29 60.884,66.091
  rectangle net GND: 33.884,70.002 65.557,70.587
  rectangle net GND: 27.686,64.119 34.9,70.587
  rectangle net GND: 65.43,62.992 67.97,70.587
  rectangle net GND: 60.325,57.683 61.316,68.834
  rectangle net GND: 58.776,57.709 60.554,59.411
  rectangle net GND: 54.407,57.302 61.316,58.369
  rectangle net NetC_ldo2_1: 49.2,61.798 55.702,63.602

## Silkscreen, mask and mechanical layers (free items; w line width, h text height)
Top Overlay:
  text "RX" at 44.145,56.236 h0.86 r90
  text "TX" at 40.742,56.185 h0.86 r90
Dimension:
  lines w0.254: 25.197,69.545 25.705,71.069 ; 25.222,16.84 25.73,15.316 ; 25.451,71.069 25.959,71.069 ; 25.476,15.316 25.984,15.316 ; 25.714,51.217 25.705,71.069 ; 25.721,35.169 25.73,15.316 ; 26.213,69.545 25.705,71.069 ; 26.238,16.84 25.73,15.316 ; 27.178,11.836 27.178,12.344 ; 28.701,12.601 27.178,12.09 ; 28.703,11.585 27.178,12.09 ; 40.001,12.11 27.178,12.09 ; 55.541,12.135 68.365,12.155 ; 66.84,12.66 68.365,12.155 ; 66.841,11.644 68.365,12.155 ; 68.364,12.409 68.365,11.901
  text "55.753 (mm)" at 24.8,50.962 h1.52 r270.03
  text "41.187 (mm)" at 40.257,11.197 h1.52 r0.09
tDocu:
  text "Mike Hord" at -32.15,50.4 h1.51
  text "Revised by: Kade Jensen" at -52.47,47.86 h1.51

## Text inside footprints (layer, text, board x,y; h text height)
A: tNames ">NAME" at 67.437,40.878 h0.69 r270; tValues ">VALUE" at 65.024,41.148 h0.69 r270; tFinish ">name" at 65.075,41.095 h0.69 r270
C_BAT: tNames ">NAME" at 35.634,66.167 h1.57 r180; tValues ">VALUE" at 35.634,69.158 h1.57 r180
C_usb: tNames ">NAME" at 54.051,67.587 h1.57 r270; tValues ">VALUE" at 51.06,67.587 h1.57 r270
D: tNames ">NAME" at 67.437,25.816 h0.69 r270; tValues ">VALUE" at 65.024,26.086 h0.69 r270; tFinish ">name" at 65.075,26.033 h0.69 r270
I2C: tNames ">NAME" at 50.682,14.681 h0.69 r180; tValues ">VALUE" at 50.952,17.094 h0.69 r180; tFinish ">name" at 50.899,17.043 h0.69 r180
JP1: tDocu "+" at 37.541,67.513 h1.97 r180; tDocu "-" at 32.461,67.513 h1.97 r180
NRF2: Top Overlay "8" at 33.147,25.603 h1.27 r270; Top Overlay "7" at 30.607,25.603 h1.27 r270; Top Overlay "1" at 30.607,36.779 h1.27 r270; Top Overlay "2" at 33.147,37.287 h1.27 r270
Prog: Top Overlay "6" at 33.147,14.834 h1.27 r270; Top Overlay "5" at 30.607,14.834 h1.27 r270; Top Overlay "2" at 33.147,23.978 h1.27 r270; Top Overlay "1" at 30.607,23.47 h1.27 r270
S1: tNames ">Name" at 66.726,67.005 h0.94 r270
UEXT: Top Overlay "10" at 31.623,53.569 h1.27 r90; Top Overlay "9" at 34.163,53.569 h1.27 r90; Top Overlay "1" at 34.163,39.853 h1.27 r90; Top Overlay "2" at 31.623,39.345 h1.27 r90